# Altium PCB LedBoard_PCB.PcbDoc
Units mm, origin at the board's own origin, x right, y up, seen from the top; angles counter-clockwise.
Board outline 50 x 15 mm, 2 copper layers (Top Layer, Bottom Layer); 11 components, 9 nets, 23 pads, 0 vias.
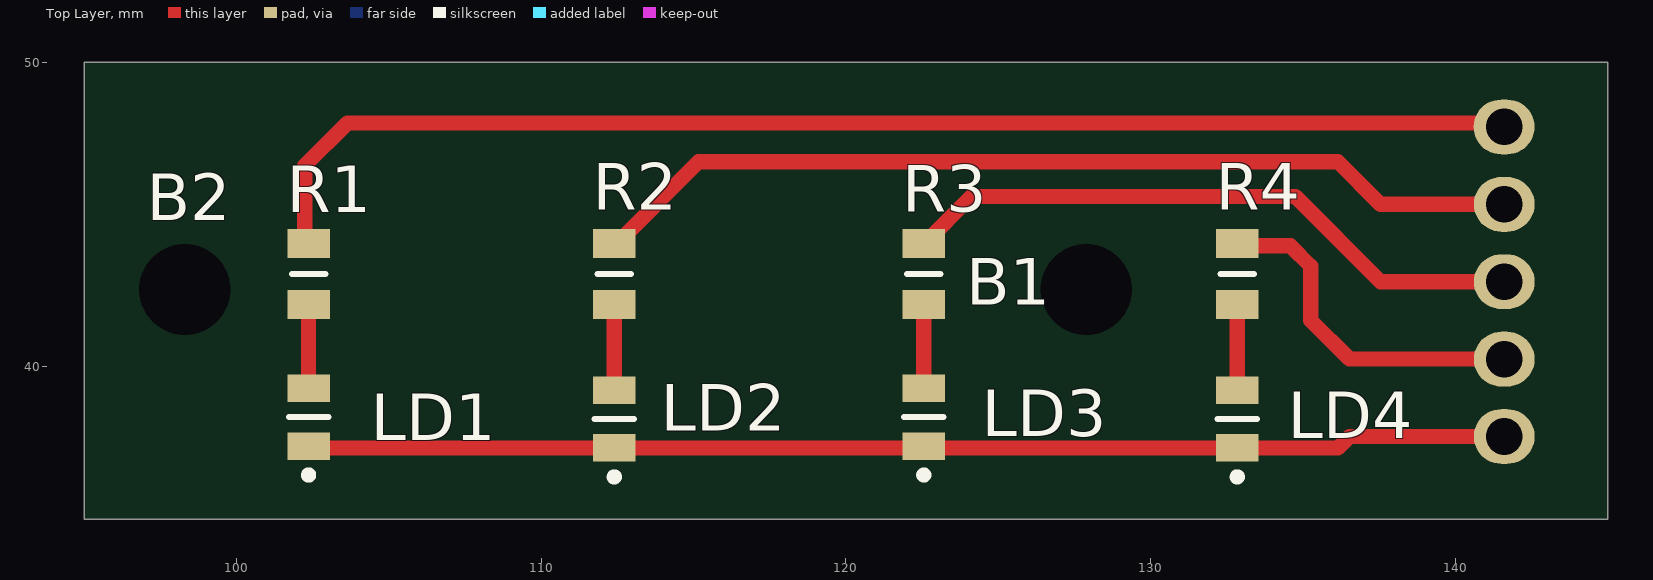
[diagram p0: Top Layer view]
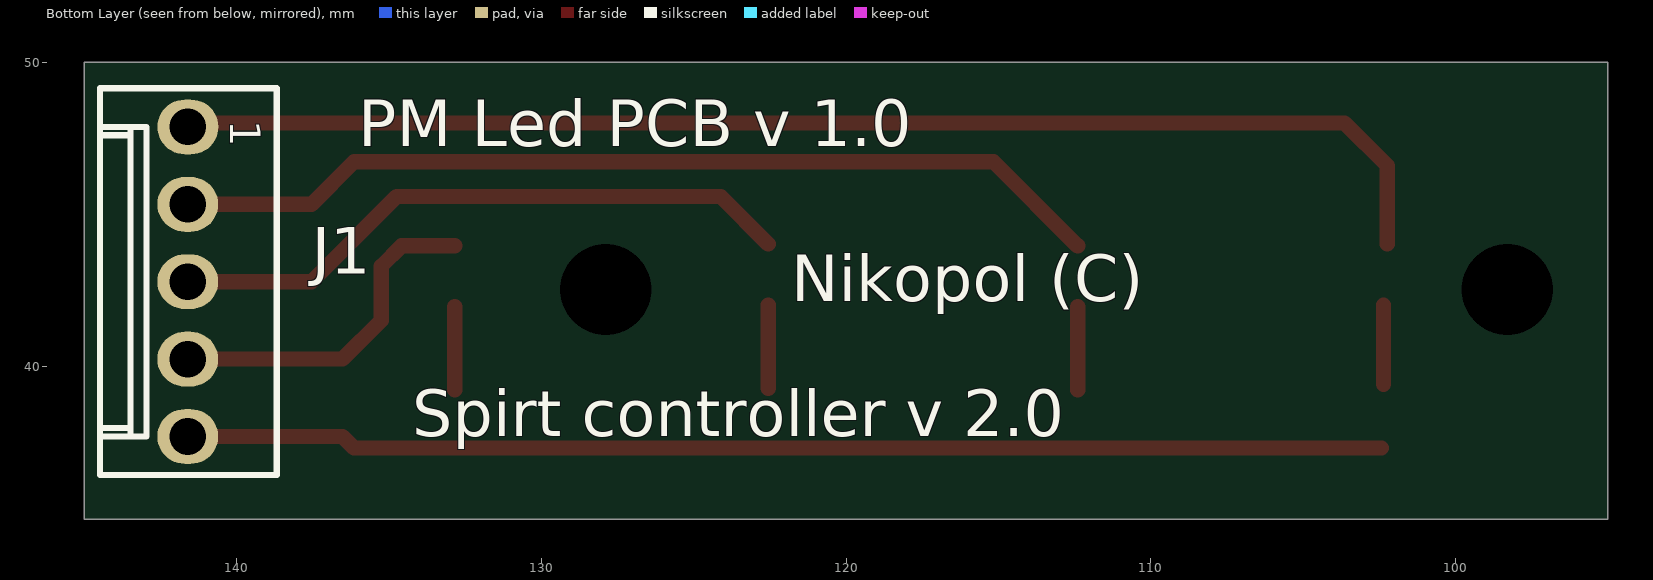
[diagram p1: Bottom Layer view, seen from below]
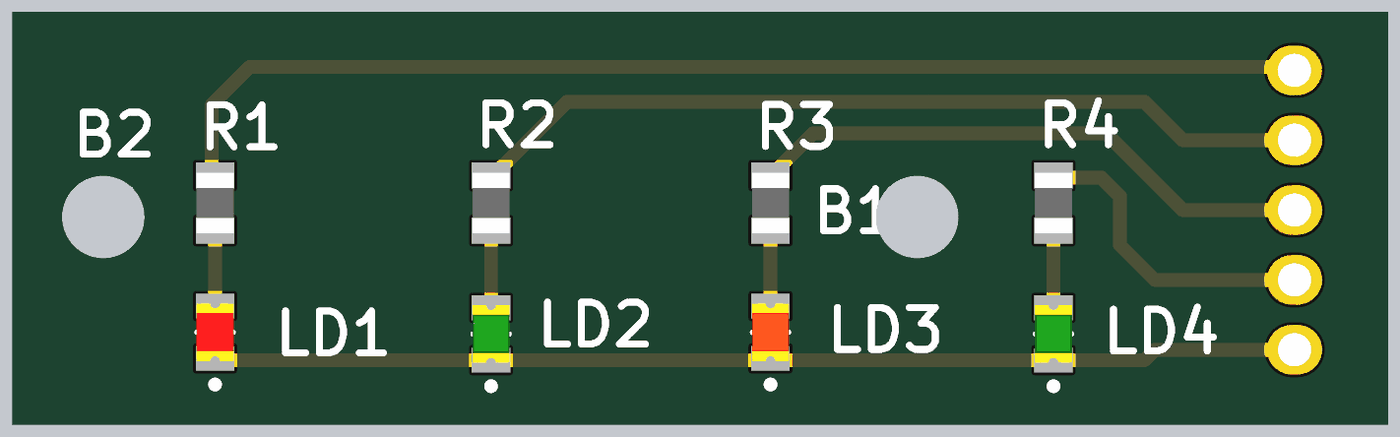
[diagram p2: 3D render of the assembled board from above, using the file's embedded part models]

## Layer stack, top to bottom
Top Solder: solder mask 0.0102, Solder Resist, Dk 3.5
Top Layer: signal copper 0.0356
Dielectric 1: dielectric 0.32, FR-4, Dk 4.8
Bottom Layer: signal copper 0.0356
Bottom Solder: solder mask 0.0102, Solder Resist, Dk 3.5

## Board outline
95,35 145,35 145,50 95,50

## Design rules (kind name [scope] priority, off if disabled: settings)
Clearance [All] p1: gap=0.254
HoleSize [All] p1: absolutevalues=TRUE maxlimit=6 minlimit=0.5 maxpercent=80.000 minpercent=20.000
PolygonConnect [All] p1: connectstyle=Relief reliefconductorwidth=0.254 reliefentries=4 polygonreliefangle="90 Angle" airgapwidth=0.254
RoutingVias [All] p1: holewidth=0.711 width=1.27 viastyle="Through Hole" minholewidth=0.711 minwidth=1.27 maxholewidth=0.711 maxwidth=1.27
SilkToSolderMaskClearance [IsPad] p1: minsilkscreentomaskgap=0.2 clearancetoexposedcopper=TRUE
SolderMaskExpansion [All] p1: expansion=0.102
UnpouredPolygon [All] p1: allowunpoured=FALSE
Width [All] p1: maxlimit=2 minlimit=0.254 preferedwidth=0.254
27 further rules are at their usual default settings.

## Components (designator, comment, footprint, x,y, rotation, side; value= is the part's Value field where it differs from the comment)
B1 "Non Plated Hole" MTG300 127.889,42.545 r0 top
B2 "Non Plated Hole" MTG300 98.298,42.545 r0 top
J1 "KK®" MOLEX_22-27-2051 141.605,42.799 r270 bottom
LD1 "Super Red" LED_OSRAM_LSR976 102.362,38.354 r90 top
LD2 "Green" LED_OSRAM_LGR971 112.395,38.293 r90 top
LD3 "Orange" LED_OSRAM_LOR976 122.555,38.354 r90 top
LD4 "Green" LED_OSRAM_LGR971 132.842,38.293 r90 top
R1 "220" RESC2012X60N 102.362,43.053 r270 top
R2 "220" RESC2012X60N 112.395,43.053 r270 top
R3 "220" RESC2012X60N 122.555,43.053 r270 top
R4 "220" RESC2012X60N 132.842,43.053 r270 top

## Footprints (in the part's own frame and the unit in brackets; to place one, negate y for a bottom-side part, rotate by r counter-clockwise, add the part's x,y. Pads: shape width x height; smd on the part's side, far side on the other; paste and mask are expansions set on the pad)
LED_OSRAM_LGR971 [mm] "Green Chip LED, 2-Leads, Body 2.0x1.25mm, IPC Medium Density"
  rect 0.9x1.4 smd: 1(-0.95,0) 2(0.95,0)
  silkscreen extent -2.02,-0.65 0,0.65, body extent -1.05,-0.67 1.05,0.68, height 0.9
LED_OSRAM_LOR976 [mm] "Orange Chip LED, 2-Leads, Body 2.0x1.25mm, IPC Medium Density"
  rect 0.9x1.4 smd: 1(-0.95,0) 2(0.95,0)
  silkscreen extent -2.02,-0.65 0,0.65, body extent -1.05,-0.67 1.05,0.68, height 0.9
LED_OSRAM_LSR976 [mm] "Super Red Chip LED, 2-Leads, Body 2.0x1.25mm, IPC Medium Density"
  rect 0.9x1.4 smd: 1(-0.95,0) 2(0.95,0)
  silkscreen extent -2.02,-0.65 0,0.65, body extent -1.05,-0.67 1.05,0.68, height 0.9
MOLEX_22-27-2051 [mm] "2.54mm (.100\") Pitch KK® Header, Single Row, Vertical, 5 Circuits"
  oval 1.8x2 hole 1.2: 1(-5.08,0.005) 2(-2.54,0) 3(0,0) 4(2.54,0) 5(5.08,0)
  silkscreen extent -6.35,-2.88 6.35,2.92, body extent -6.35,-2.88 6.35,2.92, height 11.7
MTG300 [mm] "Non Plated Through Hole: Hole Dia.=3.0mm"
  round 2.7 hole 3 unplated: 1(0,0)
RESC2012X60N [mm] "Chip Resistor, EIA 0805, Metric 2012, Body 2.0x1.2mm, IPC Medium Density"
  rect 0.95x1.4 smd: 1(-1,0) 2(1,0)
  silkscreen extent 0,-0.55 0,0.55, body extent -1.1,-0.67 1.1,0.68, height 0.6

## Part data
B1 B2: library part NON-PLATED_HOLE3.0, "Single Terminal Socket"
J1: library part MOLEX_22-27-2051, "Connector 5 Male"
LD1: library part LED_OSRAM_LSR976, "LED Red 1C 2A"
LD2 LD4: library part LED_OSRAM_LGR971, "LED Green 1C 2A"
LD3: library part LED_OSRAM_LOR976, "LED Orange 1C 2A"
R1 R2 R3 R4: library part R0805_220R_1%_0.125W_100PPM, "Resistor - 1%"

## Nets (pads, with @x,y where several pads share a name; then routed paths per layer and width w, separated by ;. In a path a pad name is that pad's centre, name@x,y a point inside that pad or via, vN(x,y) a via of type N, cw(c..) or ccw(c..) an arc to the next point about the centre after c; other vN are vias at no path point)
GND: J1.5 LD1.1 LD2.1 LD3.1 LD4.1 | length 39.3
  Top Layer w0.5: LD1.1@102.423,37.343 LD2.1 LD4.1 136.149,37.343 136.525,37.719 J1.5
LED1: J1.1 R1.1 | length 42.6
  Top Layer w0.5: R1.1@102.235,44.037 102.235,46.609 103.637,48.011 141.478,48.011 J1.1@141.61,47.879
LED2: J1.2 R2.1 | length 30.9
  Top Layer w0.5: R2.1@112.395,43.976 115.155,46.736 136.144,46.736 137.541,45.339 J1.2
LED3: J1.3 R3.1 | length 20.9
  Top Layer w0.5: R3.1@122.555,44.037 124.111,45.593 134.747,45.593 137.541,42.799 J1.3
LED4: J1.4 R4.1 | length 11.3
  Top Layer w0.5: R4.1@132.842,43.976 134.586,43.976 135.255,43.307 135.255,41.529 136.525,40.259 J1.4
NetLD1_2: LD1.2 R1.2 | length 2.6
  Top Layer w0.5: LD1.2@102.362,39.431 R1.2@102.362,42.037
NetLD2_2: LD2.2 R2.2 | length 2.7
  Top Layer w0.5: LD2.2 R2.2@112.395,41.976
NetLD3_2: LD3.2 R3.2 | length 2.7
  Top Layer w0.5: LD3.2 R3.2@122.555,42.037
NetLD4_2: LD4.2 R4.2 | length 2.7
  Top Layer w0.5: LD4.2 R4.2@132.842,41.976
pads on no net: B1.1 B2.1

## Silkscreen, mask and mechanical layers (free items; w line width, h text height)
Bottom Overlay:
  text "PM Led PCB v 1.0" at 136.017,47.244 h1.52
  text "Nikopol (C)" at 121.793,42.164 h1.52
  text "Spirt controller v 2.0" at 134.239,37.719 h1.52
Mechanical 1:
  the board outline again, w0.254

## Text inside footprints (layer, text, board x,y; h text height)
J1: Bottom Overlay "1" at 140.205,48.099 h1 r90; Mechanical 14 "1" at 140.205,48.099 h1 r90